# Altium PCB PCB1.PcbDoc
Units mil, origin at the board's own origin, x right, y up, seen from the top; angles counter-clockwise.
Board outline 866.14 x 1811.02 mil, 4 copper layers (Top Layer, Int1 (GND), Int2 (PWR), Bottom Layer), stack 30.362 mil thick; 35 components, 64 nets, 225 pads, 283 vias.
Unrouted connection lines stored in the file: 1.
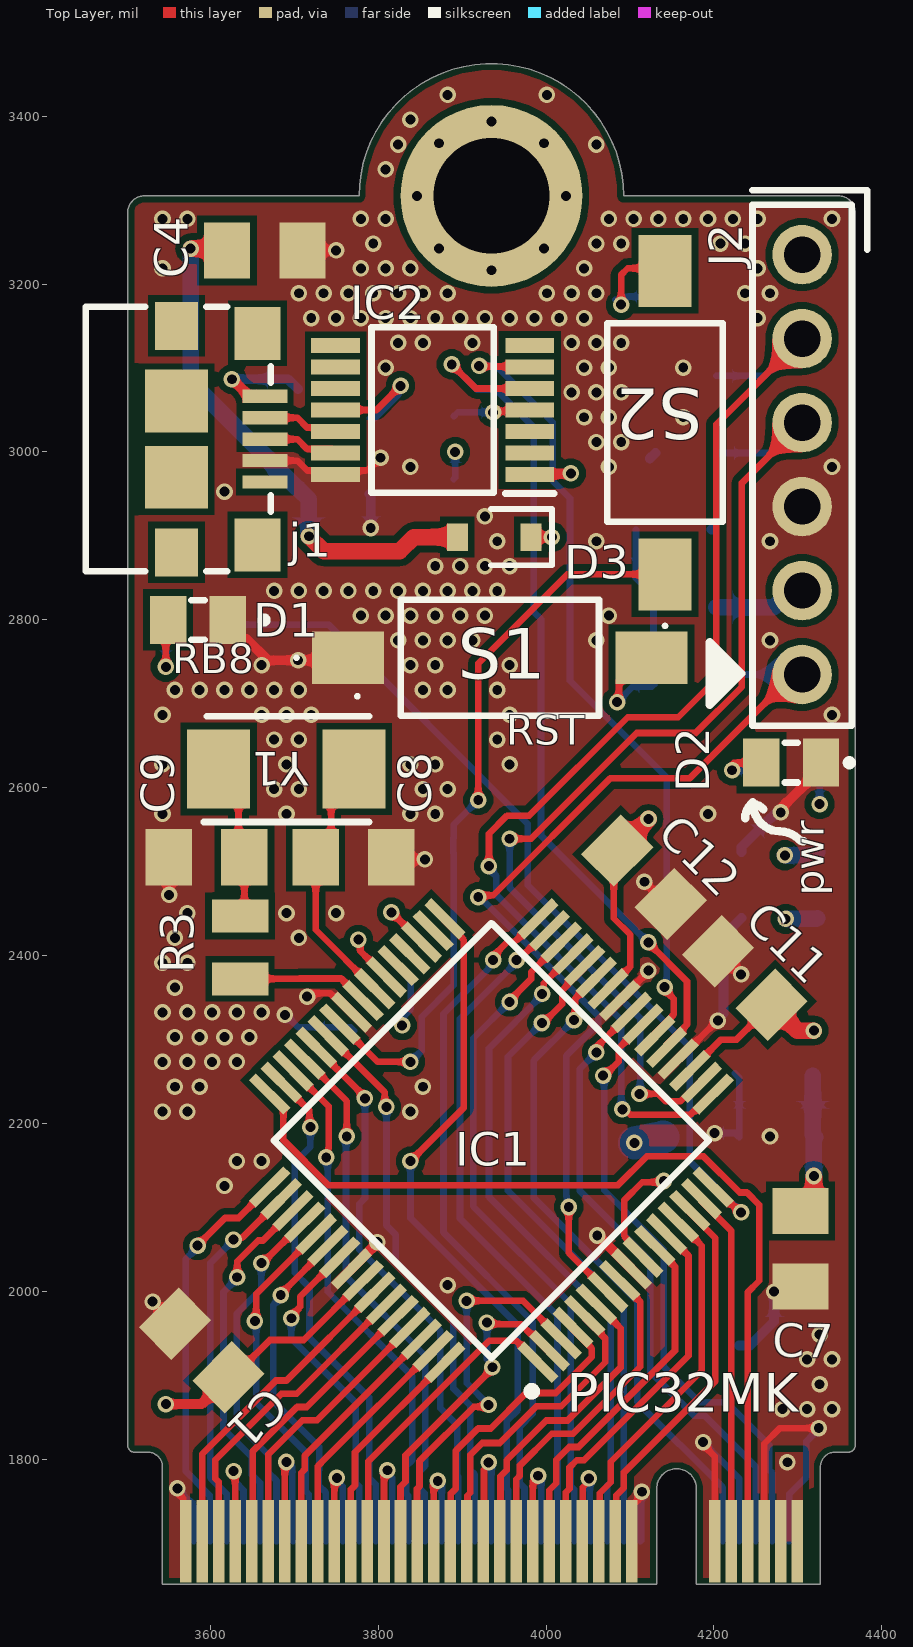
[diagram p0: Top Layer view]
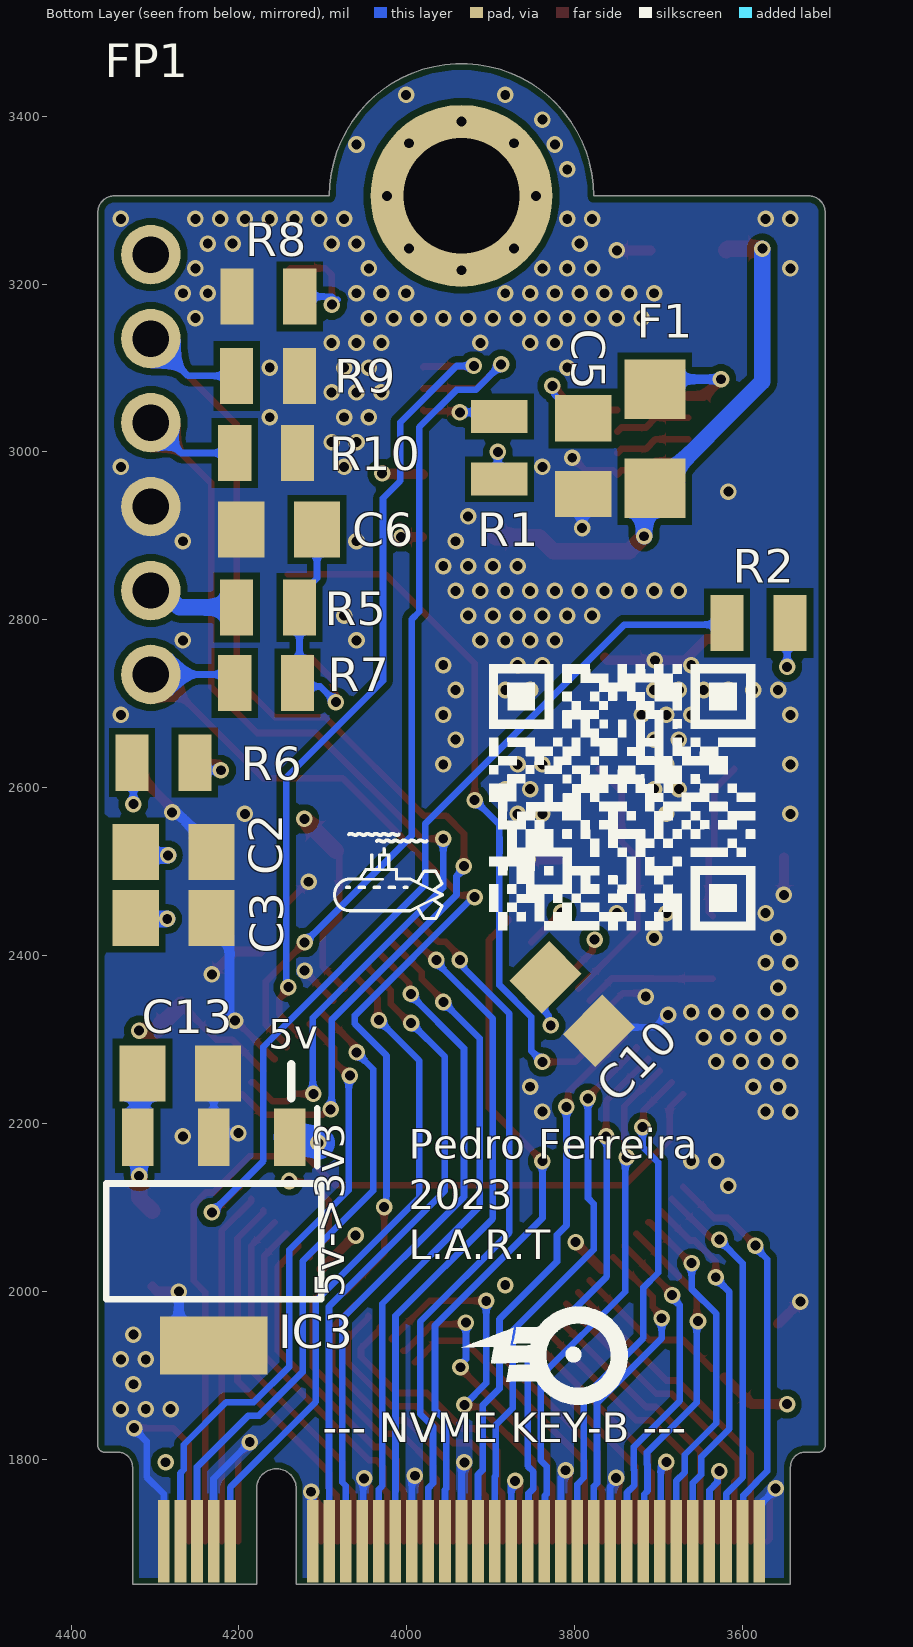
[diagram p1: Bottom Layer view, seen from below]
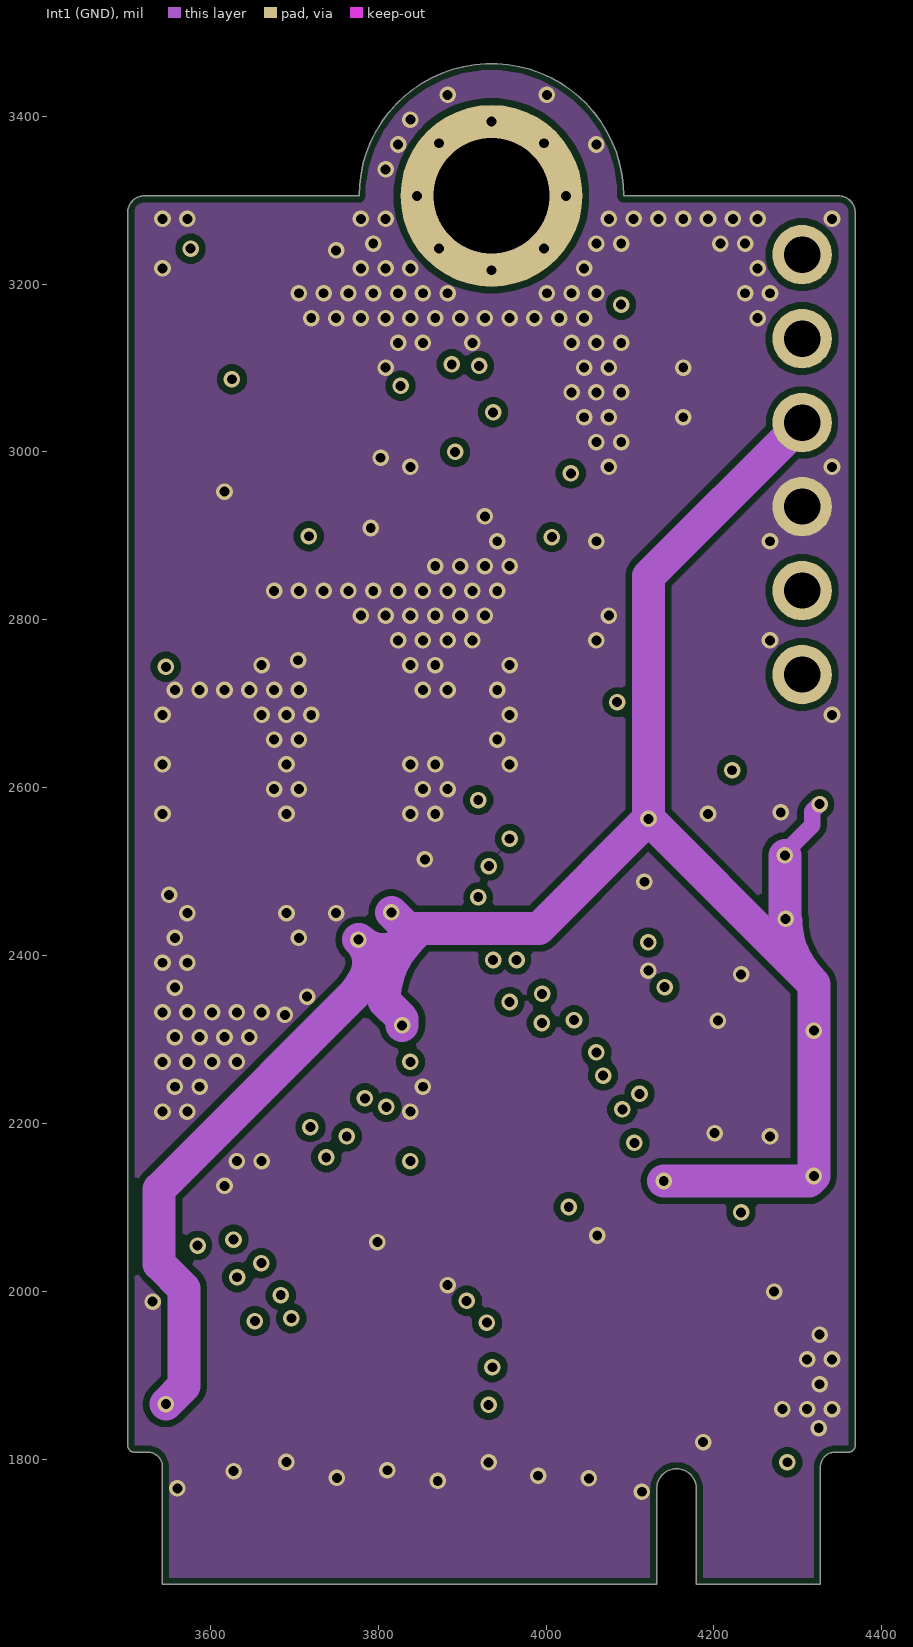
[diagram p2: Int1 (GND)]
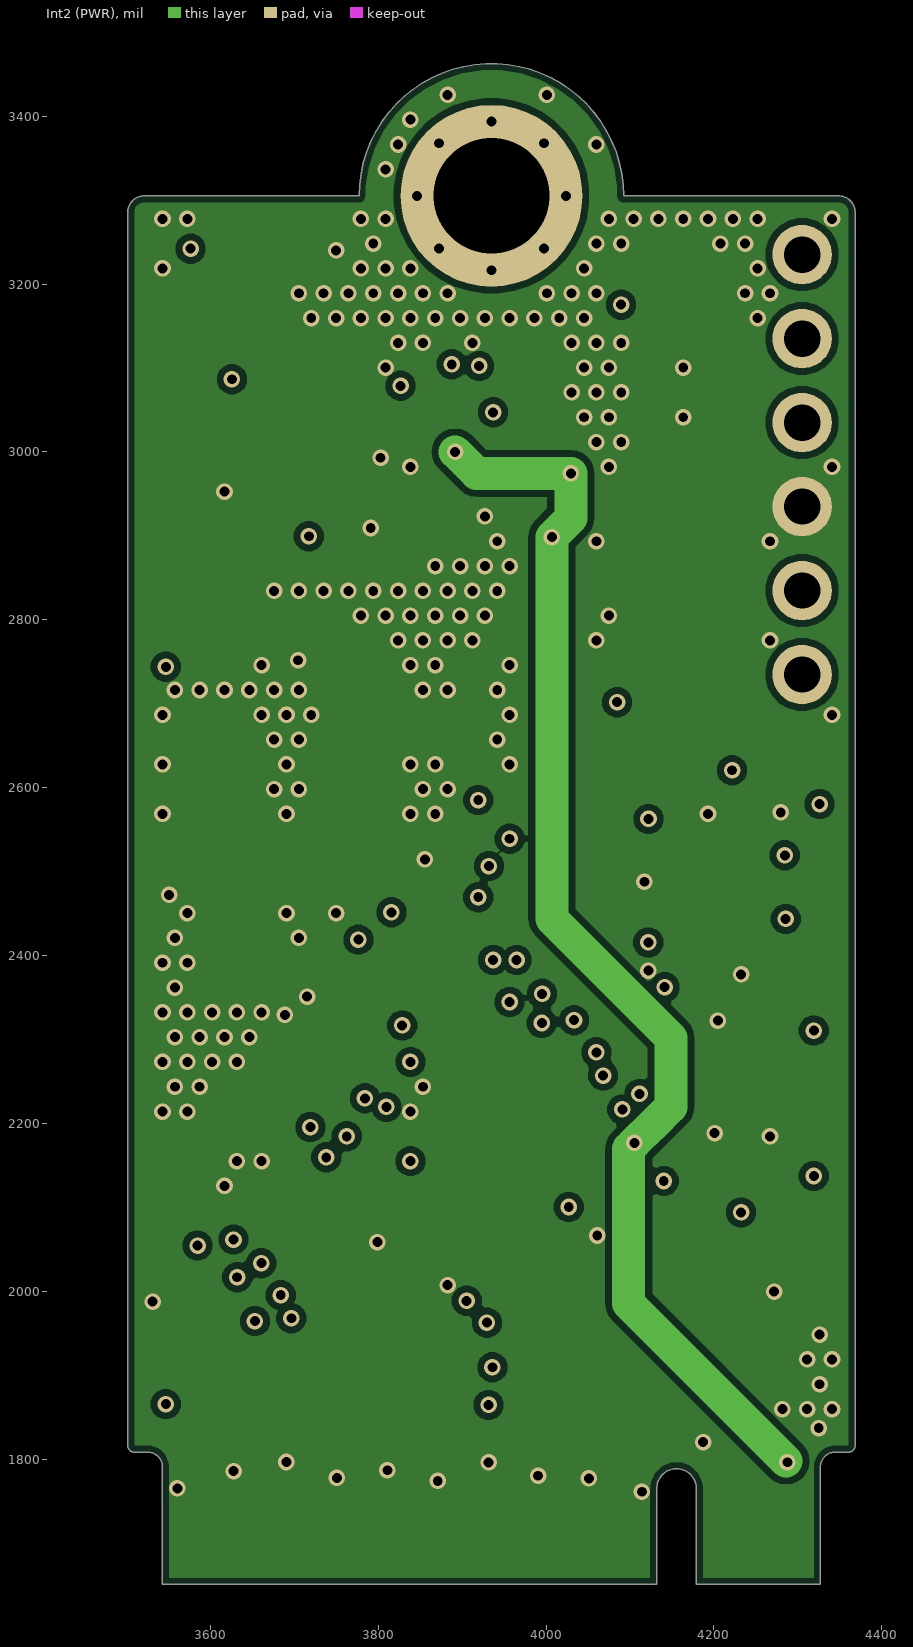
[diagram p3: Int2 (PWR)]
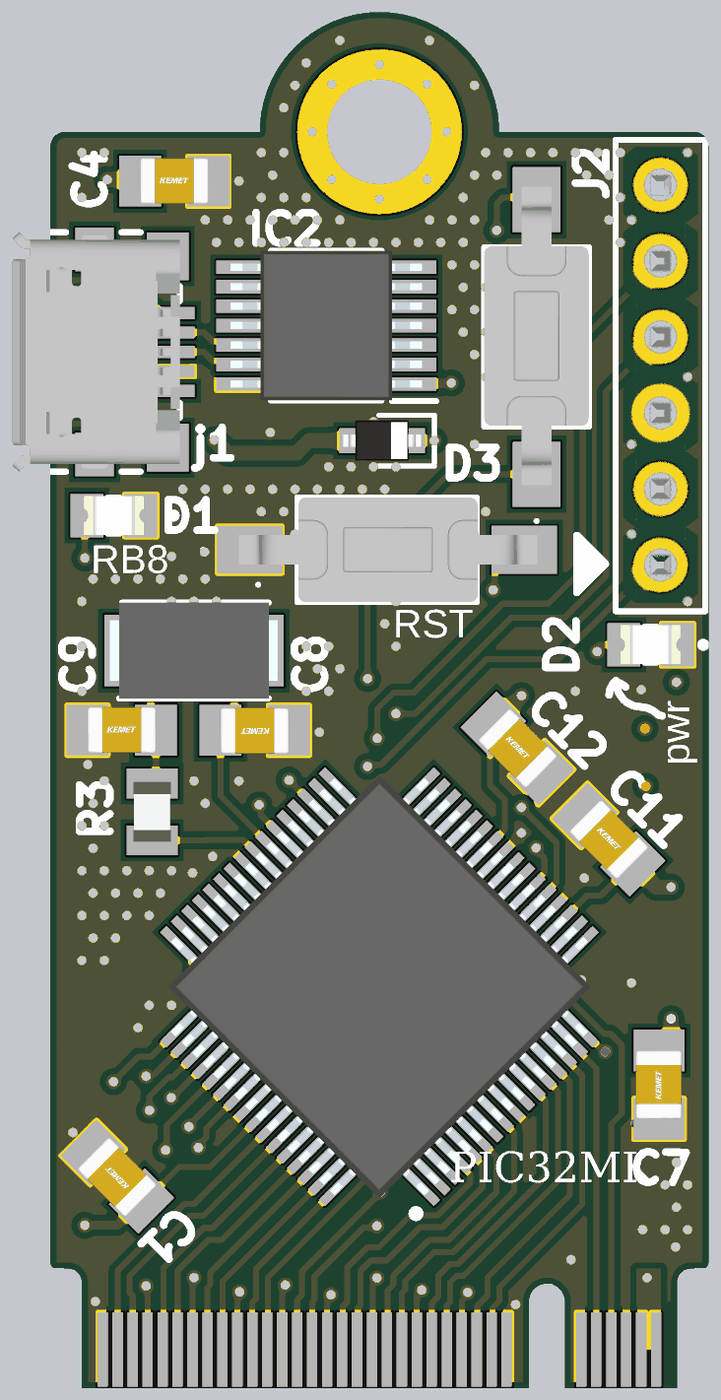
[diagram p4: 3D render of the assembled board from above, using the file's embedded part models]
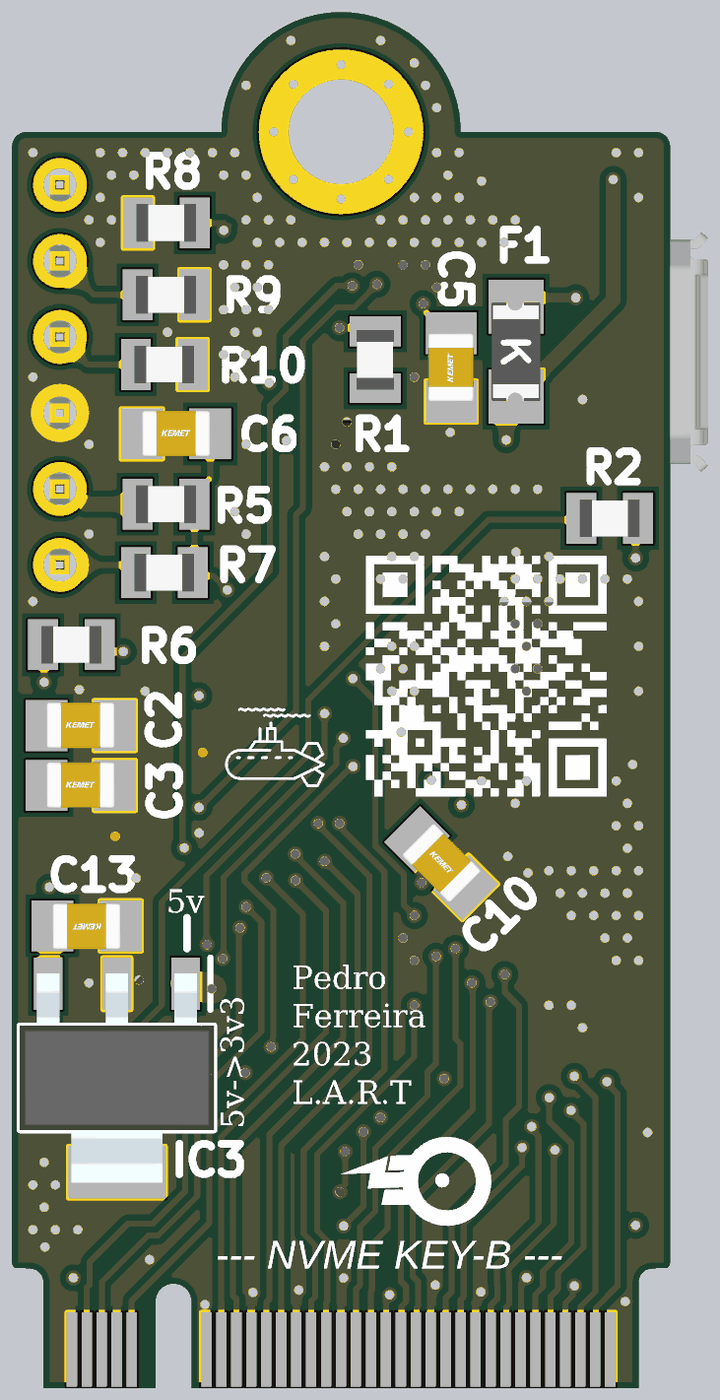
[diagram p5: 3D render of the assembled board from below, using the file's embedded part models]

## Layer stack, top to bottom
Top Solder: solder mask 1, SM-001, Dk 4
Top Layer: signal copper 1.378
Dielectric 1: prepreg 8.2835, PP-017, Dk 4.4
Int1 (GND): signal copper 0.5984
Dielectric 3: core 9.8425, Core-039, Dk 4.6
Int2 (PWR): signal copper 0.5984
Dielectric 5: prepreg 8.2835, PP-017, Dk 4.4
Bottom Layer: signal copper 1.378
Bottom Solder: solder mask 1, SM-001, Dk 4

## Board outline
3501.93,1816.81 ccw(c3509.8,1816.81) 3509.8,1808.94 3525.55,1808.94 cw(c3525.55,1791.22) 3543.27,1791.22 3543.27,1651.46 4131.85,1651.46 4131.85,1765.63 cw(c4155.47,1765.63) 4179.09,1765.63 4179.09,1651.46 4326.73,1651.46 4326.73,1791.22 cw(c4344.45,1791.22) 4344.45,1808.94 4360.2,1808.94 ccw(c4360.2,1816.81) 4368.07,1816.81 4368.07,3285.32 ccw(c4348.39,3285.32) 4348.39,3305 4092.48,3305 ccw(c3935,3305) 3777.52,3305 3521.62,3305 ccw(c3521.61,3285.31) 3501.93,3285.32

## Design rules (kind name [scope] priority, off if disabled: settings)
BoardOutlineClearance [All] p1: gap=7.87 ignorepadtopadclearanceinfootprint=FALSE
Clearance [All] p1: gap=7.87 ignorepadtopadclearanceinfootprint=TRUE
ComponentClearance [All] p1: gap=5 collisioncheckmode=3 verticalgap=5 showdistances=TRUE
DiffPairsRouting [All] p1: maxlimit=15 minlimit=8 mostfreqgap=10 toplayer_prefgap=8 toplayer_minwidth=8 toplayer_maxwidth=1000 toplayer_prefwidth=8 midlayer1_mingap=10 midlayer1_maxgap=10 midlayer1_minwidth=15 midlayer1_maxwidth=15 midlayer1_prefwidth=15 midlayer2_mingap=10 midlayer2_maxgap=10 midlayer2_minwidth=15 midlayer2_maxwidth=15 midlayer2_prefwidth=15 bottomlayer_prefgap=8 bottomlayer_minwidth=8 bottomlayer_maxwidth=1000 bottomlayer_prefwidth=8 maxuncoupledlength=500
Height [All] p1: minheight=0 maxheight=71497.94 prefheight=500
HoleSize [All] p1: absolutevalues=TRUE maxlimit=248.03 minlimit=11.81 maxpercent=80.000 minpercent=20.000
HoleToHoleClearance [All] p1: gap=9.84 allowstackedmicrovias=FALSE
MinimumAnnularRing [All] p1: minimumring=3
MinimumSolderMaskSliver [All] p1: minsoldermaskwidth=0
PlaneClearance [All] p1: clearance=10
PlaneConnect PlaneConnectPowerPads [InPadClass('PowerPads')] p1: planeconnectstyle=Direct reliefexpansion=20 reliefentries=4 reliefconductorwidth=10 reliefairgap=10
PlaneConnect [All] p2: planeconnectstyle=Direct reliefexpansion=11.81 reliefentries=4 reliefconductorwidth=8 reliefairgap=0
PolygonConnect PolygonConnectPowerPads [All vs (InPadClass('PowerPads'))] p1: connectstyle=Direct reliefconductorwidth=10 reliefentries=4 polygonreliefangle="90 Angle" airgapwidth=10
PolygonConnect [All] p2: connectstyle=Direct reliefconductorwidth=8 reliefentries=4 polygonreliefangle="90 Angle" airgapwidth=8
RoutingVias [All] p1: holewidth=11.81 width=19.68 viastyle="Through Hole" minholewidth=11.81 minwidth=19.68 maxholewidth=23.62 maxwidth=259.84
SilkToSilkClearance [All] p1: silktosilkclearance=0
SilkToSolderMaskClearance [IsPad] p1: minsilkscreentomaskgap=5 clearancetoexposedcopper=TRUE
SolderMaskExpansion [All] p1: expansion=2.95 istentingtop=FALSE
UnRoutedNet [All] p1: checkbadconnections=TRUE
Width [All] p1: maxlimit=39.37 minlimit=7.87 preferedwidth=10
19 further rules are at their usual default settings.

## Classes and differential pairs
net class DIFF_USB: D2_N D2_P
differential pair D2: +D2_P -D2_N

## Components (designator, comment, footprint, x,y, rotation, side; value= is the part's Value field where it differs from the comment)
C1 "0.1u" CAP_0805 3590,1930 r135 top
C2 "47u" CAP_0805 4277.83,2523.62 r180 bottom
C3 "4.7u" CAP_0805 4277.83,2444.88 r180 bottom
C4 "10u" CAP_0805 3665,3240 r0 top
C5 "33n" CAP_0805 3790,2995 r90 bottom
C6 "0.1u" CAP_0805 4152.13,2907.5 r180 bottom
C7 "0.1u" CAP_0805 4303.15,2051.18 r90 top
C8 "??" CAP_0805 3770.79,2517.4 r180 top
C9 "??" CAP_0805 3595.79,2517.4 r0 top
C10 "0.1u" CAP_0805 3803.15,2342.52 r225 bottom
C11 "0.1u" CAP_0805 4236.7,2373.53 r315 top
C12 "0.1u" CAP_0805 4116.7,2493.53 r315 top
C13 "3.3u" CAP_0805 4270,2260 r0 bottom
D1 "SML-LXT0805IW-TR" LEDC2012X120N 3585.43,2800 r180 top
D2 "SML-LXT0805IW-TR" LEDC2012X120N 4291.97,2630 r180 top
D3 "D_SCHOTTKY_SOD_323" SOD-323 3938.39,2898.62 r0 top
F1 "F1206" FUSE_1206 3704.72,3015.75 r270 bottom
FP1 "M2-KEY-B-2242" M2-KEY-B-2242 3935,1651.46 r180 bottom locked
IC1 "PIC32MK1024MCM064-I_PT" QFP50P1200X1200X120-64N 3935,2180 r135 top
IC2 "MCP2221A-I_ST" SOP65P640X120-14N 3865,3050 r180 top
IC3 "MIC5239-3.3YS-TR" SOT230P700X180-4N 4230,2060 r270 bottom
j1 "MicroB_1981568-1" 1981568-1 3451.73,3015.28 r270 top
J2 "6-pin-header" G800W302018EU 4305,2985 r0 top
R1 "10k" RES_0805 3890,3005 r90 bottom
R2 "10k" RES_0805 3581.3,2796.38 r180 bottom
R3 "??" RES_0805 3635.79,2410 r270 top
R5 "10k" RES_0805 4165.35,2814.96 r180 bottom
R6 "1k" RES_0805 4290,2630 r0 bottom
R7 "1k" RES_0805 4167.6,2725 r180 bottom
R8 "10k" RES_0805 4165,3185 r0 bottom
R9 "10k" RES_0805 4165.35,3090.55 r180 bottom
R10 "10k" RES_0805 4167.6,2998.75 r180 bottom
S1 "1437566-4" 14375664 3945,2755 r0 top
S2 "1437566-4" 14375664 4141.73,3035.04 r90 top
Y1 "???" ABM38000MHZC4T 3690.79,2622.4 r180 top

## Footprints (in the part's own frame and the unit in brackets; to place one, negate y for a bottom-side part, rotate by r counter-clockwise, add the part's x,y. Pads: shape width x height; smd on the part's side, far side on the other; paste and mask are expansions set on the pad)
1981568-1 [mm]
  rect 0.4x1.35 smd: 1(-1.3,5.425) 2(-0.65,5.425) 3(0,5.425) 4(0.65,5.425) 5(1.3,5.425)
  rect 1.6x1.4 smd: 6(-3.2,5.2) 7(3.2,5.2)
  rect 1.45x1.3 smd: 8(-3.425,2.75) 9(3.425,2.75)
  rect 1.9x1.9 smd: 10(-1.15,2.75) 11(1.15,2.75)
  silkscreen extent -4,0 4,5.6, body extent -4,0 4,5.6, height 2.79
14375664 [mm]
  rect 2.18x1.6 smd: 1(-4.59,0) 2(4.59,0)
  silkscreen extent -6.2,-1.75 3,1.75, body extent -4.95,-1.75 5.02,1.75, height 4.42
ABM38000MHZC4T [mm]
  rect 1.9x2.4 smd: 1(-2.05,0) 2(2.05,0)
  silkscreen extent -2.5,-2.25 2.5,1.6, body extent -2.81,-1.6 2.81,1.6, height 1.4
CAP_0805 [mm]
  rect 1.4x1.7 smd: 1(-1.143,0) 2(1.143,0)
  body extent -1.15,-0.76 1.15,0.79, height 1.01
FUSE_1206 [mm]
  rect 1.8x1.84 smd: 1(-1.5,0) 2(1.5,0)
  body extent -1.65,-0.82 1.65,0.81, height 0.84
G800W302018EU [mm]
  round 1.8 hole 1.1 mask+0.07: 1(0,6.35) 2(0,3.81) 3(0,1.27) 4(0,-1.27) 5(0,-3.81) 6(0,-6.35)
  silkscreen extent -1.5,-7.9 1.97,8.3, body extent -1.25,-7.62 1.25,7.62, height 8.61
LEDC2012X120N [mm]
  rect 1.1x1.45 smd: A(0.9,0) C(-0.9,0)
  silkscreen extent -2.1,-0.6 0.2,0.6, body extent -1,-0.65 1,0.65, height 0.9
M2-KEY-B-2242 [mm]
  rect 0.35x2.5 smd far side: 1(-9.25,1.3) 3(-8.75,1.3) 5(-8.25,1.3) 7(-7.75,1.3) 9(-7.25,1.3) 11(-6.75,1.3) 21(-4.25,1.3) 23(-3.75,1.3) 25(-3.25,1.3) 27(-2.75,1.3) 29(-2.25,1.3) 31(-1.75,1.3) 33(-1.25,1.3) 35(-0.75,1.3) 37(-0.25,1.3) 39(0.25,1.3) 41(0.75,1.3) 43(1.25,1.3) 45(1.75,1.3) 47(2.25,1.3) 49(2.75,1.3) 51(3.25,1.3) 53(3.75,1.3) 55(4.25,1.3) 57(4.75,1.3) 59(5.25,1.3) 61(5.75,1.3) 63(6.25,1.3) 65(6.75,1.3) 67(7.25,1.3) 69(7.75,1.3) 71(8.25,1.3) 73(8.75,1.3) 75(9.25,1.3)
  rect 0.35x2.5 smd: 2(-9,1.3) 4(-8.5,1.3) 6(-8,1.3) 8(-7.5,1.3) 10(-7,1.3) 20(-4.5,1.3) 22(-4,1.3) 24(-3.5,1.3) 26(-3,1.3) 28(-2.5,1.3) 30(-2,1.3) 32(-1.5,1.3) 34(-1,1.3) 36(-0.5,1.3) 38(0,1.3) 40(0.5,1.3) 42(1,1.3) 44(1.5,1.3) 46(2,1.3) 48(2.5,1.3) 50(3,1.3) 52(3.5,1.3) 54(4,1.3) 56(4.5,1.3) 58(5,1.3) 60(5.5,1.3) 62(6,1.3) 64(6.5,1.3) 66(7,1.3) 68(7.5,1.3) 70(8,1.3) 72(8.5,1.3) 74(9,1.3)
  round 5.5 hole 3.5: MH(0,42)
QFP50P1200X1200X120-64N [mm]
  rect 1.475x0.3 smd: 1(-5.738,3.75) 2(-5.738,3.25) 3(-5.738,2.75) 4(-5.738,2.25) 5(-5.738,1.75) 6(-5.738,1.25) 7(-5.738,0.75) 8(-5.738,0.25) 9(-5.738,-0.25) 10(-5.738,-0.75) 11(-5.738,-1.25) 12(-5.738,-1.75) 13(-5.738,-2.25) 14(-5.738,-2.75) 15(-5.738,-3.25) 16(-5.738,-3.75) 33(5.738,-3.75) 34(5.738,-3.25) 35(5.738,-2.75) 36(5.738,-2.25) 37(5.738,-1.75) 38(5.738,-1.25) 39(5.738,-0.75) 40(5.738,-0.25) 41(5.738,0.25) 42(5.738,0.75) 43(5.738,1.25) 44(5.738,1.75) 45(5.738,2.25) 46(5.738,2.75) 47(5.738,3.25) 48(5.738,3.75)
  rect 0.3x1.475 smd: 17(-3.75,-5.738) 18(-3.25,-5.738) 19(-2.75,-5.738) 20(-2.25,-5.738) 21(-1.75,-5.738) 22(-1.25,-5.738) 23(-0.75,-5.738) 24(-0.25,-5.738) 25(0.25,-5.738) 26(0.75,-5.738) 27(1.25,-5.738) 28(1.75,-5.738) 29(2.25,-5.738) 30(2.75,-5.738) 31(3.25,-5.738) 32(3.75,-5.738) 49(3.75,5.738) 50(3.25,5.738) 51(2.75,5.738) 52(2.25,5.738) 53(1.75,5.738) 54(1.25,5.738) 55(0.75,5.738) 56(0.25,5.738) 57(-0.25,5.738) 58(-0.75,5.738) 59(-1.25,5.738) 60(-1.75,5.738) 61(-2.25,5.738) 62(-2.75,5.738) 63(-3.25,5.738) 64(-3.75,5.738)
  silkscreen extent -6.35,-4.65 4.65,4.65, body extent -6,-6 6,6, height 1.2
RES_0805 [mm]
  rect 1x1.7 smd: 1(-0.95,0) 2(0.95,0)
  body extent -1,-0.63 1,0.63, height 0.47
SOD-323 [mm]
  rect 0.63x0.83 smd: A(-1.115,0) K(1.115,0)
  silkscreen extent -0.1,-0.85 1.75,0.85, body extent -1.3,-0.68 1.3,0.68, height 1.1
SOP65P640X120-14N [mm]
  rect 1.475x0.45 smd: 1(-2.938,1.95) 2(-2.938,1.3) 3(-2.938,0.65) 4(-2.938,0) 5(-2.938,-0.65) 6(-2.938,-1.3) 7(-2.938,-1.95) 8(2.938,-1.95) 9(2.938,-1.3) 10(2.938,-0.65) 11(2.938,0) 12(2.938,0.65) 13(2.938,1.3) 14(2.938,1.95)
  silkscreen extent -3.67,-2.5 1.85,2.52, body extent -3.2,-2.5 3.2,2.5, height 1.2
SOT230P700X180-4N [mm]
  rect 1.75x0.95 smd: 1(-3.15,2.3) 2(-3.15,0) 3(-3.15,-2.3)
  rect 1.75x3.25 smd: 4(3.15,0)
  silkscreen extent -4.03,-3.25 1.75,3.25, body extent -3.5,-3.25 3.5,3.25, height 1.8

## Part data
C1 C2 C3 C6 C7 C8 C9 C10 C11 C12 C13: library part CAP_0805_16V, "Capacitor SMD 0805 16V"
C4 C5: library part CAP_0805_10V, "Capacitor SMD 0805 10V"
D1 D2: "Red - LED Indication - Discrete 2V 0805 (2012 Metric)", Package="0805 Lumex", Availability="In Stock", Check_prices=https://www.snapeda.com/parts/SML-LXT0805IW-TR/Lumex+Opto%252FComponents+Inc./view-part/?ref=eda, MF="Lumex Opto/Components", MP=SML-LXT0805IW-TR, Price=None, Purchase-URL=https://pricing.snapeda.com/search/part/SML-LXT0805IW-TR/?ref=eda, SnapEDA_Link=https://www.snapeda.com/parts/SML-LXT0805IW-TR/Lumex+Opto%252FComponents+Inc./view-part/?ref=snap
D3: "Diode Schottky SMD SOD-323"
F1: library part FUSE_PPTC_1206, "Fuse PPTC SMD 1206"
FP1: "M.2 Key B 22x42 Footprint"
IC1: "Integrated Circuit", Arrow Part Number=PIC32MK1024MCM064-I/PT, Manufacturer_Name=Microchip, Mouser Part Number=579-2MK1024MCM064IPT, Arrow Price/Stock=https://www.arrow.com/en/products/pic32mk1024mcm064-ipt/microchip-technology?region=nac, Datasheet Link=https://ww1.microchip.com/downloads/aemDocuments/documents/MCU32/ProductDocuments/DataSheets/PIC32MK-GPK-MCM-with-CAN-FD-Family-DataSheet-DS60001519E.pdf, Height=1.2mm, Manufacturer_Part_Number=PIC32MK1024MCM064-I/PT, Mouser Price/Stock=https://www.mouser.co.uk/ProductDetail/Microchip-Technology/PIC32MK1024MCM064-I-PT?qs=W%2FMpXkg%252BdQ4dBI32NJdQMg%3D%3D
IC2: "Integrated Circuit", Arrow Part Number=MCP2221A-I/ST, Manufacturer_Name=Microchip, Mouser Part Number=579-MCP2221A-I/ST, Arrow Price/Stock=https://www.arrow.com/en/products/mcp2221a-ist/microchip-technology?region=nac, Datasheet Link=http://ww1.microchip.com/downloads/en/devicedoc/20005565b.pdf, Height=1.2mm, Manufacturer_Part_Number=MCP2221A-I/ST, Mouser Price/Stock=https://www.mouser.co.uk/ProductDetail/Microchip-Technology/MCP2221A-I-ST?qs=ZEMkBHnybREMkqMgzOrcGQ%3D%3D
IC3: "Integrated Circuit", Manufacturer_Name=Microchip, Mouser Part Number=998-MIC5239-3.3YSTR, Arrow Part Number=MIC5239-3.3YS-TR, Arrow Price/Stock=https://www.arrow.com/en/products/mic5239-3.3ys-tr/microchip-technology?region=nac, Datasheet Link=https://ww1.microchip.com/downloads/en/DeviceDoc/mic5239.pdf, Height=1.8mm, Manufacturer_Part_Number=MIC5239-3.3YS-TR, Mouser Price/Stock=https://www.mouser.co.uk/ProductDetail/Microchip-Technology-Micrel/MIC5239-33YS-TR?qs=U6T8BxXiZAXN0UitWWB92A%3D%3D
j1: library part Micro_B
J2: library part G800W302018EU, "Pin Header 6 Position 2.54mm Pitch", Manufacturer=Amphenol, Manufacturer Part Number=G800W302018EU
R1 R2 R3 R5 R6 R7 R8 R9 R10: library part RES_0805, "Resistor SMD 0805"
S1 S2: "Switch", Manufacturer_Name="TE Connectivity", Mouser Part Number=N/A, Arrow Part Number=1437566-4, Arrow Price/Stock=https://www.arrow.com/en/products/1437566-4/te-connectivity?region=europe, Datasheet Link=https://www.te.com/commerce/DocumentDelivery/DDEController?Action=showdoc&DocId=Customer+Drawing%7F1437566-3%7FC2%7Fpdf%7FEnglish%7FENG_CD_1437566-3_C7F14375662_1437566_3_1_c.dwg.pdf%-4, Height=4.87mm, Manufacturer_Part_Number=1437566-4, Mouser Price/Stock=https://www.mouser.co.uk/ProductDetail/TE-Connectivity-Alcoswitch/1437566-4?qs=xoXDFGdkQ2nbcMrTmW1sHA%3D%3D
Y1: library part Crystal_SMD

## Via types
v1: diameter 19.68, hole 11.81, Top Layer to Bottom Layer, tented both sides, 275 vias
v2: diameter 19.68/0/0/19.68 (per signal layer), hole 11.81, Top Layer to Bottom Layer, 8 vias

## Nets (pads, with @x,y where several pads share a name; then routed paths per layer and width w, separated by ;. In a path a pad name is that pad's centre, name@x,y a point inside that pad or via, vN(x,y) a via of type N, cw(c..) or ccw(c..) an arc to the next point about the centre after c; other vN are vias at no path point)
+3v3: C1.1 C2.1 C3.1 C7.2 C10.1 C11.2 C12.1 C13.2 IC1.10 IC1.19 IC1.26 IC1.35 IC1.38 IC1.57 IC3.3 J2.5 R5.1 R6.2 | length 4055
  Top Layer w7.87: C1.1@3636.82,1908.18 3671.18,1942.55 3711.46,1942.55 IC1.57 ; v1(3776.57,2419.29) 3778.83,2417.03 3778.83,2405.76 IC1.38 ; v1(3815.94,2451.77) 3816.14,2451.77 3851.62,2416.3 IC1.35 ; IC1.26 4100.25,2387 4100.25,2425.22 4080.71,2444.76 4080.71,2521.18 C12.1 ; IC1.10 4115.62,2043.92 4093.02,2066.52 4093.02,2108.77 4114.62,2130.37 4138.73,2130.37 v1(4140.21,2131.85) ; IC1.19 4208.3,2300.19 4226.99,2300.19 C11.2
  Top Layer w11.81: v1(3547.24,1866.14) 3589.78,1866.14 C1.1
  Top Layer w19.68: C12.1 4122.05,2562.52 v1(4122.05,2562.99) ; C11.2 4299.21,2311.02 v1(4318.92,2311.02) ; C7.2 4318.9,2111.93 v1(4318.9,2137.8)
  Int1 (GND) w19.68: v1(4284.45,2519.68) 4284.45,2522.89 4316.93,2555.37 4316.93,2571.85 v1(4325.79,2580.71)
  Int1 (GND) w39.37: v1(3547.24,1866.14) 3568.9,1887.8 3568.9,2003.68 3539.37,2033.21 3539.37,2122.05 3807.09,2389.76 ; v1(3776.57,2419.29) 3777.56,2419.29 3807.09,2389.76 ; v1(3815.94,2451.77) 3835.32,2432.4 3991.46,2432.4 v1(4122.05,2562.99) ; v1(3828.74,2317.04) 3828.74,2324.8 3807.09,2346.46 3807.09,2389.76 ; 3842.52,2425.2 3807.09,2389.76 ; v1(4140.21,2131.85) 4312.95,2131.85 v1(4318.9,2137.8) v1(4318.92,2311.02) 4318.92,2366.12 4285.43,2399.61 ; v1(4284.45,2519.68) 4284.45,2444.88 v1(4285.43,2443.9) 4285.43,2399.61 ; 4305,3035 4122.05,2852.05 v1(4122.05,2562.99) ; v1(4122.05,2562.99) 4285.43,2399.61
  Bottom Layer w7.87: v1(3828.74,2317.04) 3831,2319.3 3831,2328.61 3839.15,2336.76 3839.15,2370.16 C10.1 ; v1(4325.79,2580.71) 4325.79,2628.39 R6.2
  Bottom Layer w19.68: R5.1 4271.11,2814.96 4291.15,2835 J2.5 ; v1(4284.45,2519.68) 4318.9,2519.68 C2.1 ; v1(4285.43,2443.9) 4321.85,2443.9 C3.1 ; C13.2@4317.78,2257.22 4317.78,2186.79 IC3.3 4318.9,2182.36 v1(4318.9,2137.8)
+5V: D3.K FP1.1 FP1.3 IC2.1 IC3.1 R1.1 | length 1633.5
  Top Layer w11.81: IC2.1 3981.29,2973.85 4028.96,2973.85 v1(4029.58,2974.46) ; D3.K v1(4006.89,2898.62)
  Int2 (PWR) w39.37: v1(3891.73,3000) 3917.32,2974.41 v1@4029.53,2974.41 ; v1(4029.58,2974.46) v1@4029.53,2974.41 ; v1@4285.93,1798.3 4098.43,1985.8 4098.43,2170.28 v1(4105.31,2177.17) 4126.31,2198.16 4126.81,2198.16 4148.72,2220.07 4148.72,2302.33 4006.89,2444.15 v1(4006.89,2898.62) 4029.53,2921.26 v1@4029.53,2974.41
  Bottom Layer w7.87: R1.1 3891.73,2969.33 v1(3891.73,3000)
  Bottom Layer w39.37: v1(4105.31,2177.17) IC3.1
  other v1: 4287.36,1796.86
+VBUS: F1.1 j1.1 | length 131.3
  Top Layer w11.81: v1(3625.98,3086.61) 3626.46,3086.61 3646.61,3066.46 j1.1
  Bottom Layer w11.81: v1(3625.98,3086.61) 3692.91,3086.61 F1.1
D2_N: IC2.12 j1.2 | length 90.8
  Top Layer w8: j1.2 3703.78,3040.87 3715.38,3029.27 3744.47,3029.27 IC2.12
D2_P: IC2.13 j1.3 | length 90.8
  Top Layer w8: j1.3 3703.78,3015.28 3715.38,3003.68 3744.47,3003.68 IC2.13
GND: C1.2 C2.2 C3.2 C4.2 C5.1 C6.1 C7.1 C8.1 C9.1 C10.2 C11.1 C12.2 C13.1 D1.C D2.C FP1.2 FP1.5 FP1.8 FP1.11 FP1.20 FP1.21 FP1.26 FP1.27 FP1.32 FP1.33 FP1.38 FP1.39 FP1.44 FP1.45 FP1.50 FP1.51 FP1.56 FP1.57 FP1.62 FP1.63 FP1.68 FP1.69 FP1.74 FP1.75 IC1.9 IC1.20 IC1.25 IC1.41 IC1.56 IC2.14 IC3.2 IC3.4 j1.4 J2.4 R8.2 R9.2 R10.2 S1.1 | length 3748.2
  Top Layer w7.87: v1(3560.98,1765.75) 3563.24,1763.49 3563.24,1758.36 3567.87,1753.73 3567.87,1705.59 FP1.75 ; v1(3627.91,1786.27) 3629.88,1784.31 FP1.69 ; j1.4 3703.7,2989.68 3715.24,2978.15 3744.41,2978.15 IC2.14 3754.25,2978.15 3787.49,2978.15 3802.45,2993.11 v1(3803.15,2993.11) ; FP1.63 3688.94,1788.25 3690.21,1789.52 3690.21,1796.51 v1(3690.91,1797.2) ; v1(3715.55,2351.38) 3718.75,2351.38 3722.75,2355.38 3742.92,2355.38 3765.52,2332.78 IC1.41 ; FP1.57 3747.99,1769.2 3748.68,1769.89 3748.68,1776.04 v1(3750.94,1778.3) ; FP1.51 3807.05,1780.23 3811.02,1784.21 v1(3811.02,1787.4) ; FP1.45 3866.1,1766.45 3871.06,1771.41 v1(3871.06,1774.61) ; FP1.39 3926.14,1703.62 3926.14,1788.06 3931.54,1793.45 v1(3931.54,1796.65) ; FP1.33 3984.21,1774.43 v1(3990.59,1780.82) ; FP1.27 4043.74,1703.11 4043.74,1767.23 4051.03,1774.51 v1(4051.03,1777.71) ; IC1.25 4087.78,2347.45 4121.89,2381.56 v1(4121.89,2382.32) ; FP1.21 4102.32,1744.96 4111.87,1754.51 4111.87,1759.51 v1(4114.13,1761.77) ; v1(4117.13,2488.19) 4143.6,2461.71 C12.2 ; IC1.20 4158.18,2277.1 4203.92,2322.83 v1(4204.72,2322.83) ; v1(4187.12,1820.87) 4187.12,1817.67 4200.8,1803.99 4200.8,1702.69 FP1.11 ; FP1.5 4259.8,1818.86 4278.54,1837.6 v1(4324.8,1837.6)
  Top Layer w11.81: v1(3531.5,1988.19) 3557.87,1961.82 C1.2 ; C9.1 3551.18,2517.01 v1(3551.18,2472.44) ; D1.C 3620.87,2793.11 3636.61,2777.36 3643.5,2777.36 3668.9,2751.97 v1(3704.72,2751.97) 3761.26,2751.97 S1.1 ; C4.2 3710.16,3240.16 v1(3750,3240.16) ; IC1.56 3799.21,2058.13 v1(3799.21,2059.06) ; C8.1 3818.26,2514.93 v1(3855.86,2514.93) ; v1(4061.02,2066.93) 4061.99,2066.93 IC1.9 ; C11.1@4174.26,2405.35 C11.1 v1(4232.28,2377.95) ; v1(4271.61,2000) 4296.97,2000 C7.1 ; v1(4279.53,2570.87) 4281.03,2572.37 4281.03,2576.74 4327.4,2623.11 D2.C
  Bottom Layer w7.87: v1(3560.98,1765.75) 3560.98,1764.65 3580.67,1744.96 FP1.74 ; v1(3627.91,1786.27) 3630.17,1784.01 3630.17,1773.21 3639.72,1763.66 FP1.68 ; v1(3688.98,2329.72) 3689.9,2329.72 3704.75,2314.88 3767.15,2314.88 C10.2 ; v1(3690.91,1797.2) 3690.91,1797.13 3697.8,1790.24 3697.8,1703.62 FP1.62 ; v1(3750.94,1778.3) 3750.94,1775.1 3757.83,1768.21 FP1.56 ; v1(3811.02,1787.4) 3811.02,1784.21 3816.89,1778.34 FP1.50 ; v1(3871.06,1774.61) 3871.06,1771.41 3875.94,1766.53 FP1.44 ; v1(3931.54,1796.65) 3931.54,1793.45 3935,1789.99 FP1.38 ; v1(3990.59,1780.82) 3994.41,1777 3994.41,1702.99 FP1.32 ; v1(4051.03,1777.71) 4052.13,1776.61 4052.13,1703.62 FP1.26 ; FP1.20 4113.15,1703.62 4113.15,1760.79 v1(4114.13,1761.77) ; v1(4187.12,1820.87) 4187.12,1820.5 4230.28,1777.35 FP1.8 ; v1(4200.79,2188.98) 4225.04,2188.98 IC3.2 4230,2255 C13.1 ; FP1.2 4289.56,1702.87 4289.56,1759.05 4310.04,1779.53 4310.04,1821.74 4324.8,1836.5 v1(4324.8,1837.6)
  Bottom Layer w11.81: C5.1 3791.34,2948.66 v1(3791.34,2909.45) ; R10.2@4123.57,2992.13 R10.2 ; C6.1 C6.1@4199.07,2909.45 ; v1(4204.72,2322.83) 4204.72,2324.97 4211.18,2331.42 4211.18,2423.23 C3.2 ; IC3.4 4243.07,1935.98 4271.61,1964.53 v1(4271.61,2000) ; C2.2 4232.83,2529.53 4272.67,2569.36 4278.02,2569.36 v1(4279.53,2570.87)
  other v1: 4281.5,1860.24 4311.03,1860.24 4340.56,1860.24 4325.79,1889.77 4311.03,1919.29 4340.56,1919.29 4325.79,1948.82 3882.88,2007.88 3617.13,2125.99 3631.89,2155.51 3661.42,2155.51 4266.74,2185.04 3543.31,2214.57 3572.84,2214.57 3838.59,2214.57 3558.08,2244.1 3587.6,2244.1 3853.35,2244.1 3543.31,2273.63 3572.84,2273.63 3602.37,2273.63 3631.89,2273.63 3558.08,2303.15 3587.6,2303.15 3617.13,2303.15 3646.66,2303.15 3543.31,2332.68 3572.84,2332.68 3602.37,2332.68 3631.89,2332.68 3661.42,2332.68 3558.08,2362.21 3543.31,2391.74 3572.84,2391.74 3558.08,2421.26 3705.71,2421.26 3572.84,2450.79 3690.95,2450.79 3750.01,2450.79 3543.31,2568.9 3690.95,2568.9 3838.59,2568.9 3868.12,2568.9 4192.92,2568.9 3676.19,2598.43 3705.71,2598.43 3853.35,2598.43 3882.88,2598.43 3543.31,2627.96 3690.95,2627.96 3838.59,2627.96 3868.12,2627.96 3956.7,2627.96 3676.19,2657.48 3705.71,2657.48 3941.93,2657.48 3543.31,2687.01 3661.42,2687.01 3690.95,2687.01 3720.48,2687.01 3956.7,2687.01 4340.56,2687.01 3558.08,2716.54 3587.6,2716.54 3617.13,2716.54 3646.66,2716.54 3676.19,2716.54 3705.71,2716.54 3853.35,2716.54 3882.88,2716.54 3941.93,2716.54 3661.42,2746.07 3838.59,2746.07 3868.12,2746.07 3956.7,2746.07 3823.82,2775.59 3853.35,2775.59 3882.88,2775.59 3912.41,2775.59 4060.05,2775.59 4266.74,2775.59 3779.53,2805.12 3809.06,2805.12 3838.59,2805.12 3868.12,2805.12 3897.64,2805.12 3927.17,2805.12 4074.81,2805.12 3676.19,2834.65 3705.71,2834.65 3735.24,2834.65 3764.77,2834.65 3794.3,2834.65 3823.82,2834.65 3853.35,2834.65 3882.88,2834.65 3912.41,2834.65 3941.93,2834.65 3868.12,2864.18 3897.64,2864.18 3927.17,2864.18 3956.7,2864.18 3941.93,2893.7 4060.05,2893.7 4266.74,2893.7 3927.17,2923.23 3617.13,2952.76 3838.59,2982.29 4074.81,2982.29 4340.56,2982.29 4060.05,3011.82 4089.57,3011.82 4045.28,3041.34 4074.81,3041.34 4163.39,3041.34 4030.52,3070.87 4060.05,3070.87 4089.57,3070.87 3809.06,3100.4 4045.28,3100.4 4074.81,3100.4 4163.39,3100.4 3823.82,3129.93 3853.35,3129.93 3912.41,3129.93 4030.52,3129.93 4060.05,3129.93 4089.57,3129.93 3720.48,3159.45 3750.01,3159.45 3779.53,3159.45 3809.06,3159.45 3838.59,3159.45 3868.12,3159.45 3897.64,3159.45 3927.17,3159.45 3956.7,3159.45 3986.23,3159.45 4015.75,3159.45 4045.28,3159.45 4251.97,3159.45 3705.71,3188.98 3735.24,3188.98 3764.77,3188.98 3794.3,3188.98 3823.82,3188.98 3853.35,3188.98 3882.88,3188.98 4000.99,3188.98 4030.52,3188.98 4060.05,3188.98 4237.21,3188.98 4266.74,3188.98 3543.31,3218.51 3779.53,3218.51 3809.06,3218.51 3838.59,3218.51 4045.28,3218.51 4251.97,3218.51 3794.3,3248.04 4060.05,3248.04 4089.57,3248.04 4207.68,3248.04 4237.21,3248.04 3543.31,3277.56 3572.84,3277.56 3779.53,3277.56 3809.06,3277.56 4074.81,3277.56 4104.34,3277.56 4133.86,3277.56 4163.39,3277.56 4192.92,3277.56 4222.45,3277.56 4251.97,3277.56 4340.56,3277.56 3809.06,3336.62 3823.82,3366.15 4060.05,3366.15 3838.59,3395.67 3882.88,3425.2 4000.99,3425.2
MCLR: IC1.7 J2.6 R7.1 | length 1166.6
  Top Layer w7.87: v1(3919.29,2469.8) 3921.55,2472.06 3937.14,2472.06 4076.29,2611.22 4170.86,2611.22 4294.64,2735 J2.6 ; v1(4027.07,2100.89) 4027.07,2046.17 IC1.7
  Bottom Layer w7.87: v1(3919.29,2469.8) 3921.31,2469.8 4062.01,2329.11 4062.01,2318.9 4024.25,2281.14 4024.25,2114.02 4024.81,2113.47 4024.81,2103.15 v1(4027.07,2100.89) ; R7.1 4215,2735 J2.6
NetC4_1: C4.1 D3.A F1.2 | length 636.6
  Top Layer w19.68: v1(3576.77,3242.13) 3617.87,3242.13 C4.1 ; v1(3717.52,2899.61) 3735.24,2881.89 3825.89,2881.89 3842.62,2898.62 D3.A
  Bottom Layer w19.68: v1(3576.77,3242.13) 3576.77,3083.86 3703.94,2956.69 F1.2 3717.52,2943.9 v1(3717.52,2899.61)
NetC5_2: C5.2 IC2.11 | length 146.8
  Top Layer w7.87: IC2.11 3798.03,3050 v1(3826.77,3078.74)
  Bottom Layer w7.87: C5.2 3795.91,3040 3824.51,3068.61 3824.51,3076.48 v1(3826.77,3078.74)
NetC6_2: C6.2 R5.2 R7.2 S1.2 | length 302.4
  Top Layer w7.87: v1(4084.65,2702.07) 4086.73,2704.16 4086.73,2727.44 4114.29,2755 S1.2
  Bottom Layer w7.87: v1(4084.65,2702.07) 4103.31,2720.74 4125.94,2720.74 R7.2 ; C6.2 4107.13,2849.57 4127.95,2828.74 R5.2 R7.2@4127.95,2745.38
NetC9_2: C9.2 R3.1 Y1.2 | length 189.8
  Top Layer w7.87: Y1.2 3633.86,2598.62 3633.86,2524.33 C9.2 3640.79,2452.4 R3.1
NetD1_A: D1.A R2.2 | length 110.7
  Top Layer w7.87: v1(3547.24,2744.09) 3547.24,2797.24 D1.A
  Bottom Layer w7.87: R2.2 3547.24,2793.03 v1(3547.24,2744.09)
NetD2_A: D2.A R6.1 | length 78.5
  Top Layer w7.87: v1(4221.57,2620.95) 4220.43,2622.09 4220.43,2626.4 4223.75,2629.72 4223.75,2630 D2.A
  Bottom Layer w7.87: v1(4221.57,2620.95) 4243.55,2620.95 R6.1
NetIC1_16: IC1.16 R2.1 | length 1072.2
  Top Layer w7.87: IC1.16 4200.61,2124.66 4230.81,2094.45 v1(4232.28,2094.45)
  Bottom Layer w7.87: R2.1 3620.68,2794.4 3741.03,2794.4 3978.35,2557.09 3978.35,2484.25 4170.94,2291.65 4170.94,2155.79 v1(4232.28,2094.45)
NetIC1_42: IC1.42 S2.1 | length 877.4
  Top Layer w7.87: IC1.42 3799.62,2273.62 v1(3838.58,2273.62) ; v1(3919.31,2585.5) 3919.31,2748.05 4025.59,2854.33 S2.1
  Bottom Layer w7.87: v1(3838.58,2273.62) 3852.15,2287.19 3852.15,2327.49 3889.93,2365.27 3889.93,2522.36 3889.76,2522.53 3889.76,2540.47 3889.93,2540.63 3889.93,2556.12 v1(3919.31,2585.5)
NetIC2_4: IC2.4 R1.2 | length 93.8
  Top Layer w7.87: v1(3937.01,3047.24) 3938.39,3048.62 3979.29,3048.62 IC2.4
  Bottom Layer w7.87: R1.2 3894.84,3047.24 v1(3937.01,3047.24)
NetR8_1: R8.1 S2.2 | length 138.8
  Top Layer w7.87: v1(4089.41,3175.43) 4089.41,3210.87 4097.28,3218.74 4138.74,3218.74 S2.2
  Bottom Layer w7.87: v1@4082.68,3181.1 4085.87,3181.1 4089.77,3185 R8.1
OSCI: C8.2 IC1.39 Y1.1 | length 309.9
  Top Layer w7.87: Y1.1 3744.09,2595 3744.09,2535.71 C8.2 3725.79,2430.97 IC1.39
OSCO: IC1.40 R3.2 | length 157.5
  Top Layer w7.87: R3.2 3706.15,2372.6 3706.58,2373.03 3755.89,2373.03 IC1.40
PGEC1: IC1.17 J2.2 R9.1 | length 1430.6
  Top Layer w7.87: v1(3932.09,2506.89) 3932.09,2545.39 3953.63,2566.93 3980.12,2566.93 4097.25,2684.06 4157.48,2684.06 4202.76,2729.33 4202.76,3032.76 J2.2 ; v1(4090.91,2217.04) 4094.1,2217.04 4100.23,2210.92 4171.92,2210.92 4196.35,2235.34 IC1.17
  Bottom Layer w7.87: v1(3932.09,2506.89) 3932.09,2503.69 3940.94,2494.84 3940.94,2472.44 4089.66,2323.72 4089.66,2218.28 v1(4090.91,2217.04) ; R9.1 4260.55,3090.55 J2.2
PGED1: IC1.18 J2.3 R10.1 | length 1266.3
  Top Layer w7.87: v1(3956.69,2539.37) 3982.17,2539.37 4108.16,2665.35 4178.15,2665.35 4233.23,2720.44 4233.23,2963.23 J2.3 ; v1(4111.32,2235.56) 4133.78,2235.56 4142.67,2226.66 4159.83,2226.66 4162.81,2229.65 4182.43,2249.26 IC1.18
  Bottom Layer w7.87: v1(3956.69,2539.37) 3956.69,2481.3 4112.09,2325.9 4112.09,2236.33 v1(4111.32,2235.56) ; R10.1 4268.75,2998.75 J2.3
RA0: FP1.25 IC1.13 | length 442.6
  Top Layer w7.87: FP1.25 4063.94,1703.62 4063.94,1760 4077.03,1773.09 4077.03,1797.5 4185.46,1905.94 4185.46,2054.81 IC1.13
RA1: FP1.23 IC1.14 | length 456.1
  Top Layer w7.87: FP1.23 4083.62,1703.62 4083.62,1757.41 4092.78,1766.56 4092.78,1784.7 4201.77,1893.7 4201.77,2063.56 4171.3,2094.03 IC1.14
RA4: FP1.36 IC1.33 | length 836.4
  Top Layer w7.87: v1(3838.58,2155.51) 3902.26,2219.18 3902.26,2418.75 3879.66,2441.35 IC1.33
  Bottom Layer w7.87: v1(3838.58,2155.51) 3838.58,2087.71 3966.54,1959.76 3966.54,1859.25 3953.19,1845.91 3953.19,1765.32 3954.68,1763.83 FP1.36
RA7: FP1.53 IC1.1 | length 367.9
  Top Layer w7.87: FP1.53 3788.35,1703.62 3788.35,1797.82 3932.19,1941.67 3964.54,1941.67 IC1.1
RA8: FP1.30 IC1.31 | length 822.2
  Top Layer w7.87: v1(3965,2395) 3967.02,2395 4002.24,2430.22 IC1.31
  Bottom Layer w7.87: v1(3965,2395) 3965,2392.37 3897.64,2325.01 3897.64,2087.36 4013.63,1971.37 4013.63,1762.22 4013.74,1762.11 FP1.30
RA10: FP1.55 IC1.64 | length 259.6
  Top Layer w7.87: FP1.55 3767.68,1764.41 3772.6,1769.33 3772.6,1808.81 IC1.64
RA11: FP1.29 IC1.12 | length 442.9
  Top Layer w7.87: FP1.29 4023.58,1760.91 4028,1765.32 4028,1790.79 4036.57,1799.36 4045.31,1799.36 4169.72,1923.77 4169.72,2042.72 IC1.12
RA12: FP1.31 IC1.11 | length 430.8
  Top Layer w7.87: FP1.31 4003.9,1763.5 4012.25,1771.85 4012.25,1799.65 4027.71,1815.11 4038.79,1815.11 4153.54,1929.87 4153.54,2029.68 4129.54,2053.68 IC1.11
RB0: FP1.9 IC1.15 | length 422.7
  Top Layer w7.87: IC1.15 4185.22,2107.95 4220.43,2072.74 FP1.9
RB4: FP1.34 IC1.32 | length 845.9
  Top Layer w7.87: v1(3937.01,2395) 3939.27,2397.26 3939.27,2401.94 3953.99,2416.65 3962.86,2416.65 IC1.32
  Bottom Layer w7.87: v1(3937.01,2395) 3937.01,2391.8 3932.03,2386.83 3932.03,2385.1 3877.95,2331.02 3877.95,2070.61 3984.25,1964.31 3984.25,1854.69 3968.94,1839.38 3968.94,1771.85 3974.37,1766.42 FP1.34
RB5: FP1.40 IC1.43 | length 674.7
  Top Layer w7.87: IC1.43 3807.74,2237.66 3807.74,2222.26 v1(3810,2220)
  Bottom Layer w7.87: v1(3810,2220) 3810,2078.89 3821.28,2067.61 3821.28,2035.9 3889.76,1967.41 3889.76,1884.66 3909.89,1864.54 3909.89,1787.68 3915.31,1782.25 FP1.40
RB6: FP1.42 IC1.44 | length 664.1
  Top Layer w7.87: IC1.44 3726.54,2289.74 3784.41,2231.87 v1(3784.41,2230.24)
  Bottom Layer w7.87: v1(3784.41,2230.24) 3784.41,2111.41 3777.56,2104.56 3777.56,2050.09 3874.02,1953.63 3874.02,1861.58 3894.14,1841.46 3894.14,1781.16 3895.63,1779.67 FP1.42
RB7: FP1.48 IC1.46 | length 625.6
  Top Layer w7.87: IC1.46 3741.11,2220.78 3741.11,2171.09 3740.61,2170.6 3740.61,2162.26 v1(3738.35,2160)
  Bottom Layer w7.87: v1(3738.35,2160) 3740,2158.35 3740,2000 3840.55,1899.45 3840.55,1799.1 3833.66,1792.21 3833.66,1759.11 3835.59,1757.19 3835.59,1703.62 FP1.48
RB8: FP1.7 IC1.48 | length 1095.1
  Top Layer w7.87: IC1.48 3687.22,2218.99 3687.22,2180.5 3740.76,2126.97 4085.74,2126.97 4119.95,2161.17 4187.67,2161.17 4230.74,2118.11 4239.24,2118.11 4253.94,2103.42 4253.94,2012.95 4240.12,1999.13 FP1.7
RB9: FP1.72 IC1.49 | length 485.2
  Top Layer w7.87: v1(3585,2055) 3617.76,2087.76 3633.97,2087.76 IC1.49
  Bottom Layer w7.87: v1(3585,2055) 3585,2052.72 3570.83,2038.55 3570.83,1786.53 3584.25,1773.1 3584.25,1772.41 3599.37,1757.3 3599.37,1703.62 FP1.72
RB10: FP1.67 IC1.60 | length 348
  Top Layer w7.87: FP1.67 3650.55,1703.62 3650.55,1809.74 3703.54,1862.74 3715.17,1862.74 IC1.60
RB11: FP1.65 IC1.61 | length 334.9
  Top Layer w7.87: FP1.65 3669.25,1806.17 3710.07,1846.99 3727.26,1846.99 IC1.61
RB12: FP1.61 IC1.62 | length 300.4
  Top Layer w7.87: FP1.61 3708.62,1784.3 3712.56,1788.24 3712.56,1804.45 IC1.62
RB13: FP1.59 IC1.63 | length 284.1
  Top Layer w7.87: FP1.59 3728.31,1792.35 3737.2,1801.25 IC1.63
RB14: FP1.49 IC1.2 | length 397
  Top Layer w7.87: FP1.49 3826.73,1767.75 3832.68,1773.69 3832.68,1805.12 3936.2,1908.64 v1(3936.2,1910.04) ; v1(3929.71,1963.18) 3931.54,1961.35 3970.19,1961.35 4001.76,1929.78 IC1.2
  Bottom Layer w7.87: v1(3929.71,1963.18) 3929.71,1919.73 3936.2,1913.24 v1(3936.2,1910.04)
RB15: FP1.47 IC1.3 | length 473
  Top Layer w7.87: FP1.47 3846.42,1765.16 3849.41,1768.15 3849.41,1798.23 3914.08,1862.9 3929.28,1862.9 v1(3931.54,1865.16) ; v1(3905.51,1989.17) 3972.71,1989.17 IC1.3
  Bottom Layer w7.87: v1(3905.51,1989.17) 3905.51,1891.18 v1(3931.54,1865.16)
RC2: FP1.4 IC1.23 | length 739.7
  Top Layer w7.87: v1(4068.01,2257.45) 4069.93,2257.45 4086.67,2274.19 4086.67,2289.91 IC1.23
  Bottom Layer w7.87: v1(4068.01,2257.45) 4069.26,2256.2 4069.26,2120.74 4140.02,2049.98 4140.02,1910.84 4182.6,1868.26 4215.26,1868.26 4265.71,1817.81 4265.71,1787.89 4269.65,1783.96 FP1.4
RC6: FP1.70 IC1.50 | length 456.4
  Top Layer w7.87: v1(3627.85,2062.15) 3630.11,2064.41 3638.46,2064.41 IC1.50
  Bottom Layer w7.87: FP1.70 3619.89,1702.79 3619.89,1759.05 3600,1778.94 3600,2033.62 3627.85,2061.47 v1(3627.85,2062.15)
RC7: FP1.66 IC1.51 | length 449.7
  Top Layer w7.87: v1(3632.26,2017.26) 3632.26,2035.94 3657.35,2061.03 3662.92,2061.03 IC1.51
  Bottom Layer w7.87: v1(3632.26,2017.26) 3632.26,2015.96 3615.98,1999.68 3615.98,1836.77 3649.57,1803.19 3649.57,1782.26 3659.41,1772.42 FP1.66
RC8: FP1.64 IC1.52 | length 435
  Top Layer w7.87: v1(3660.97,2034.03) 3662.36,2034.03 3711.23,2082.9 IC1.52
  Bottom Layer w7.87: v1(3660.97,2034.03) 3660.97,2003.21 3631.73,1973.97 3631.73,1843.29 3669.25,1805.77 3669.25,1784.85 3679.09,1775.01 FP1.64
RC9: FP1.54 IC1.55 | length 395.9
  Top Layer w7.87: v1(3696.69,1968.35) 3696.69,1971.55 3707.18,1982.04 3707.18,1993.94 IC1.55
  Bottom Layer w7.87: v1(3696.69,1968.35) 3696.69,1944.42 3773.62,1867.49 3773.62,1771.91 3777.52,1768.01 FP1.54
RC10: FP1.46 IC1.45 | length 640.5
  Top Layer w7.87: IC1.45 3762.76,2226.97 v1(3762.76,2185)
  Bottom Layer w7.87: v1(3762.76,2185) 3761.81,2184.05 3761.81,2018.19 3856.3,1923.7 3856.3,1792.58 3849.41,1785.69 3849.41,1765.64 3855.28,1759.77 3855.28,1703.62 FP1.46
RC11: FP1.6 IC1.24 | length 750.1
  Top Layer w7.87: v1(4059.99,2285.01) 4062.25,2287.27 4062.25,2293.33 IC1.24
  Bottom Layer w7.87: v1(4059.99,2285.01) 4040,2265 4040,2120.54 4124.27,2036.27 4124.27,1904.31 4176.07,1852.51 4188.83,1852.51 4249.96,1791.38 FP1.6
RC13: FP1.52 IC1.47 | length 608.7
  Top Layer w7.87: IC1.47 3718.22,2215.83 3718.22,2197.24 v1(3719.45,2196.01)
  Bottom Layer w7.87: v1@3719.42,2195.98 3719.42,2172.68 3700.79,2154.05 3700.79,2022.64 3718.35,2005.08 3718.35,1945.04 3789.37,1874.02 3789.37,1778.43 3797.2,1770.6 FP1.52
RD5: FP1.60 IC1.53 | length 424.1
  Top Layer w7.87: v1(3653.39,1965) 3655,1966.61 3655,1997.44 IC1.53
  Bottom Layer w7.87: v1(3653.39,1965) 3655,1963.39 3655,1867.75 3714.12,1808.63 3714.12,1794.37 3713.54,1793.79 3713.54,1762.81 3717.48,1758.87 3717.48,1703.62 FP1.60
RD6: FP1.58 IC1.54 | length 406.1
  Top Layer w7.87: v1(3684.09,1995.91) 3684.09,1997.3 3740.46,2053.67 IC1.54
  Bottom Layer w7.87: v1(3684.09,1995.91) 3684.09,1992.71 3675.04,1983.66 3675.04,1869.98 3729.87,1815.15 3729.87,1787.85 3729.29,1787.27 3729.29,1769.33 3737.91,1760.71 3737.91,1702.87 FP1.58
RE12: FP1.10 IC1.27 | length 796.2
  Top Layer w7.87: v1(4033.32,2323.32) 4035,2325 4035,2349.16 4059.94,2374.1 IC1.27
  Bottom Layer w7.87: v1(4033.32,2323.32) 3985.24,2275.24 3985.24,2112.09 4108.52,1988.81 4108.52,1868.84 4210.59,1766.77 FP1.10
RE13: FP1.22 IC1.28 | length 781.9
  Top Layer w7.87: v1(3995,2320) 3996.64,2320 4019.25,2342.62 4019.25,2358.9 4046.02,2385.67 IC1.28
  Bottom Layer w7.87: v1(3995,2320) 3954.72,2279.72 3954.72,2120.28 4092.78,1982.22 4092.78,1766.56 4092.48,1766.27 FP1.22
RE14: FP1.24 IC1.29 | length 803
  Top Layer w7.87: v1(3995.31,2354.69) 3997.26,2356.64 3997.26,2367.26 4032.1,2402.1 IC1.29
  Bottom Layer w7.87: v1(3995.31,2354.69) 3995.31,2353.04 3932.09,2289.81 3932.09,2112.91 4077.03,1967.97 4077.03,1773.09 4072.8,1768.85 FP1.24
RE15: FP1.28 IC1.30 | length 806.8
  Top Layer w7.87: v1(3956.65,2345) 3956.65,2346.65 3982.26,2372.26 3982.26,2380.37 IC1.30
  Bottom Layer w7.87: v1(3956.65,2345) 3913.39,2301.73 3913.39,2101.61 4029.38,1985.62 4029.38,1768.74 4033.43,1764.69 FP1.28
RF0: FP1.73 IC1.58 | length 389.3
  Top Layer w7.87: FP1.73 3590.51,1806.39 3678.35,1894.23 3690.99,1894.23 IC1.58
RF1: FP1.71 IC1.59 | length 379.5
  Top Layer w7.87: FP1.71 3610.2,1773.37 3606.26,1777.31 3606.26,1799.87 3684.87,1878.48 3703.08,1878.48 IC1.59
RG6: FP1.43 IC1.4 | length 363.7
  Top Layer w7.87: FP1.43 3886.77,1703.62 3886.77,1759.69 3892.72,1765.64 3892.72,1810.72 3919.16,1837.16 3934.16,1837.16 3976.35,1879.35 4011.59,1879.35 4054.7,1922.46 4054.7,1932.24 4032.1,1954.84 IC1.4
RG7: FP1.41 IC1.5 | length 376.8
  Top Layer w7.87: FP1.41 3906.46,1703.62 3906.46,1757.11 3909.89,1760.54 3909.89,1805.62 3924.15,1819.88 3944.88,1819.88 3988.6,1863.6 4018.11,1863.6 4070.45,1915.93 4070.45,1944.33 4046.02,1968.76 IC1.5
RG8: FP1.37 IC1.6 | length 369.3
  Top Layer w7.87: FP1.37 3945.83,1703.62 3945.83,1780.31 3953.19,1787.68 3953.19,1799.5 4000.3,1846.61 4025.74,1846.61 4088.82,1909.69 4088.82,1956.58 IC1.6
RG9: FP1.35 IC1.8 | length 396.8
  Top Layer w7.87: FP1.35 3964.53,1776.74 3968.94,1781.16 3968.94,1792.98 4006.82,1830.86 4032.27,1830.86 4112.14,1910.73 4112.14,1987.92 4087.78,2012.27 IC1.8
U1RX: IC1.22 IC2.6 | length 977.7
  Top Layer w7.87: v1(3920.33,3102.42) 3920.95,3101.8 3980.05,3101.8 IC2.6 ; IC1.22 4129.54,2307.72 4152.14,2330.32 4152.14,2348.6 4141.24,2359.5 v1(4141.24,2362.7)
  Bottom Layer w7.87: v1(3920.33,3102.42) 3940.8,3102.42 4007.93,3035.28 4007.93,2965.5 4028.54,2944.88 4028.54,2727.55 4143.7,2612.4 4143.7,2373.51 4143.5,2373.31 4143.5,2364.96 v1(4141.24,2362.7)
U1TX: IC1.21 IC2.5 | length 1057.9
  Top Layer w7.87: v1(3887.8,3104.33) 3916.54,3075.59 IC2.5 ; v1(4121.9,2415.96) 4121.9,2415.5 4167.88,2369.52 4167.88,2318.23 4143.46,2293.81 IC1.21
  Bottom Layer w7.87: v1(3887.8,3104.33) 3887.8,3104.22 3918.12,3073.9 3940.98,3073.9 3985.24,3029.64 3985.24,2809.78 3994.09,2800.93 3994.09,2543.31 4121.45,2415.96 v1(4121.9,2415.96)
pads on no net: FP1.MH IC1.34 IC1.36 IC1.37 IC2.2 IC2.3 IC2.7 IC2.8 IC2.9 IC2.10 j1.5 j1.6 j1.7 j1.8 j1.9 j1.10 j1.11 J2.1
copper on no net:
  other v2: 3935,3216.42 3872.36,3242.36 3997.64,3242.36 3846.42,3305 4023.58,3305 3872.36,3367.64 3997.64,3367.64 3935,3393.58

## Polygon pours and split planes (outlines as drawn)
GND on Top Layer "GND_L01_P003" (solid, remove dead copper, pour order 3): 3437.94,3437.56 3522.03,3521.65 4487.15,3521.65 4487.15,1545.83 4438.92,1497.6 4422.19,1514.33 3501.91,1514.33
+5V on Top Layer "+5V_L01_P004" (solid, pour order 4): 4273.08,1702.64 4305.42,1702.64 4305.83,1703.05 4305.64,1703.23 4305.64,1808.94 4273.08,1808.94 4273.08,1723.57
GND on Int2 (PWR) "GND_L03_P001" (solid, remove dead copper, pour order 1): 3434,3442.48 3508.25,3516.73 4483.21,3516.73 4483.21,1550.75 4434.98,1502.52 4418.25,1519.25 3497.98,1519.25
GND on Int1 (GND) "GND_L02_P002" (solid, remove dead copper, pour order 2): 3428.09,3436.57 3512.19,3520.67 4477.31,3520.67 4477.31,1544.84 4429.08,1496.61 4412.35,1513.35 3492.07,1513.35
GND on Bottom Layer "GND_L04_P000" (solid, remove dead copper, pour order 0): 3448.76,3443.46 3524,3518.7 4497.98,3518.7 4497.98,1551.73 4449.75,1503.5 4433.02,1520.23 3512.74,1520.23

## Silkscreen, mask and mechanical layers (free items; w line width, h text height)
Top Overlay:
  region: 4192.42,2773.13 4192.42,2698.33 4229.82,2735.73
  lines w10: 4259.05,2574.61 ccw(c4244.16,2559.73) 4244.16,2580.78 ; 4307.09,2536.42 cw(c4307.09,2545.92) 4300.37,2539.2 ccw(c4278.57,2517.41) 4278.57,2548.23 cw(c4278.57,2579.19) 4256.68,2557.3 4256.5,2557.47 cw(c4281.71,2582.68) 4246.06,2582.68 4244.16,2580.78 ; 4244.16,2580.78 ccw(c4260.97,2563.98) 4237.2,2563.98 cw(c4260.97,2563.98) 4244.16,2580.78 ; 4194.88,2698.82 4232.28,2736.22 4194.88,2773.62 4194.88,2754.92 4194.88,2717.52 4194.88,2698.82
  text "RB8" at 3554.95,2724.51 h60
  text "RST" at 3952.76,2639.45 h60
  text "pwr" at 4342.69,2471.46 h60 r90
  text "PIC32MK" at 4024.61,1841.54 h78.74
Bottom Overlay:
  drawing of 44 lines, arcs and shapes, not listed
  text "5v" at 4165.3,2277.57 h60
  text "Pedro Ferreira / 2023 / L.A.R.T" at 3998.03,2026.57 h60
  text "5v->3v3" at 4063.01,1993.17 h60 r270
  text "--- NVME KEY-B ---" at 4100.39,1809.06 h60

## Text inside footprints (layer, text, board x,y; h text height)
FP1: Mechanical 13 "TOP" at 4013.07,3082.57 h39.37